# EAGLE board main (EAGLE 8.3.2)
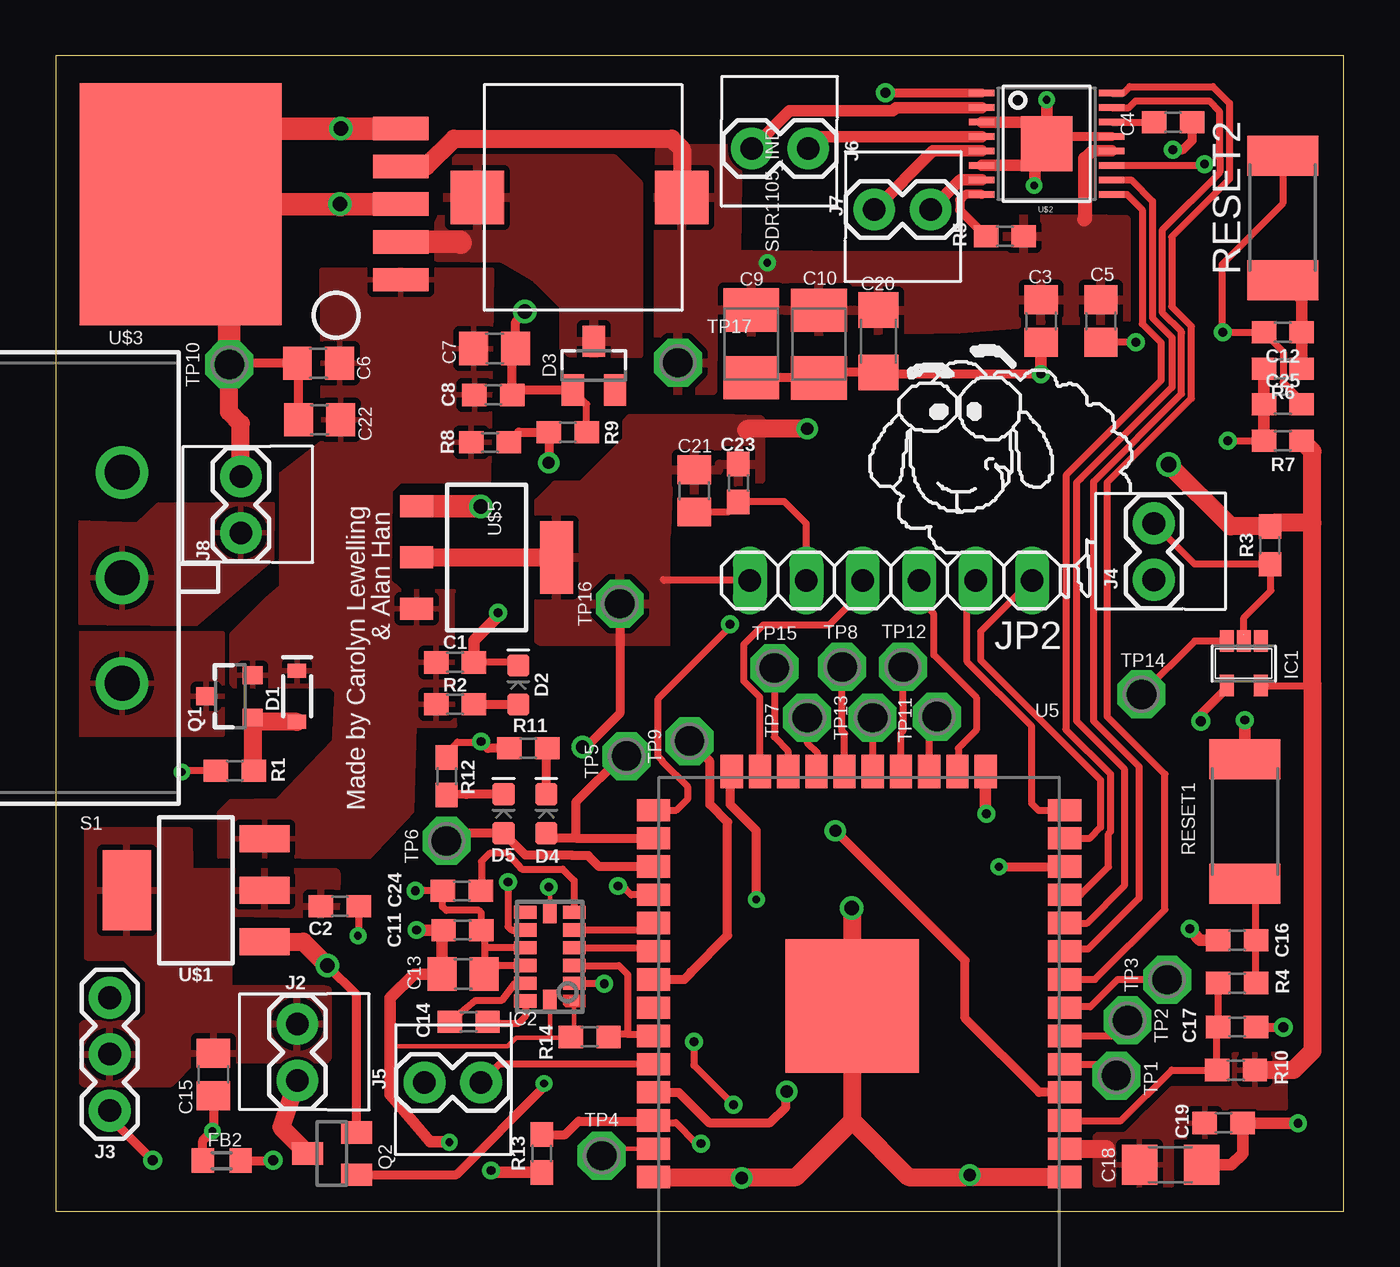
[diagram p0: board, top side]
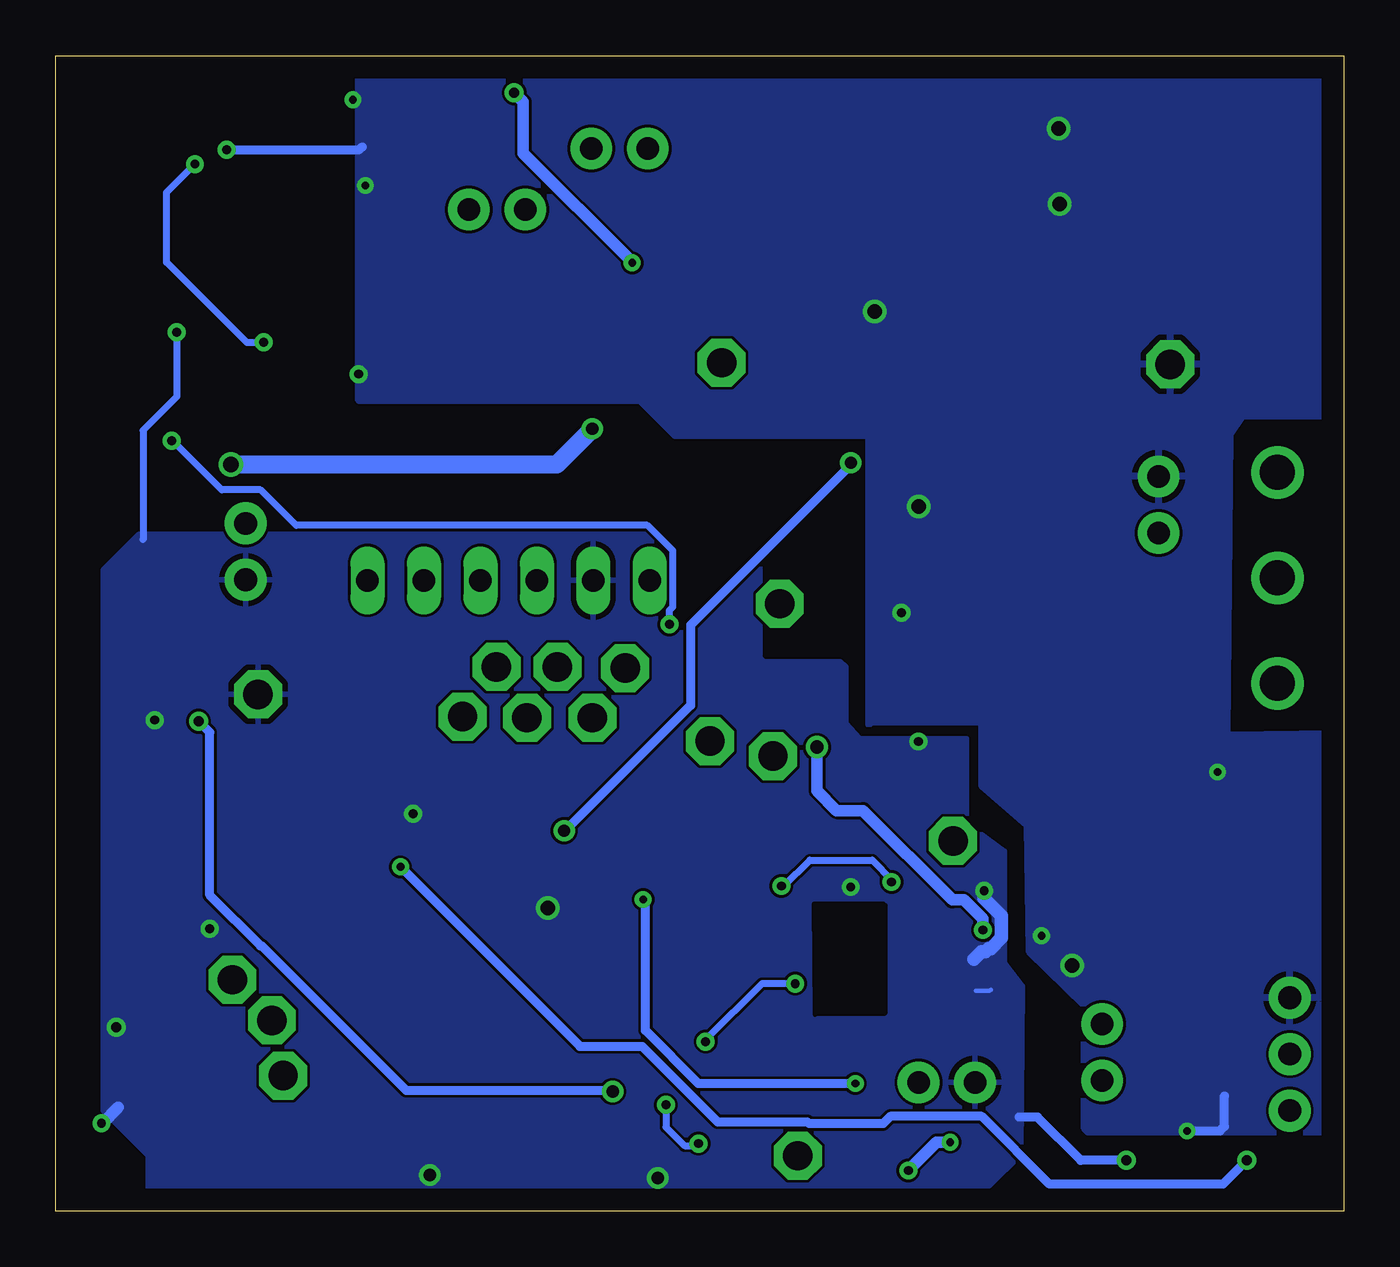
[diagram p1: board, bottom side, seen from below]

Size 58 x 52 mm. Coordinates in mm from the lower left corner, seen from the top.
Outline: 0,0 58,0 58,52 0,52 0,0
Copper layers (1*16): Top 0.035mm / dielectric 1.5mm / Bottom 0.035mm
Design rules "default *": minimum track width 6mil, minimum drill 0.35mm, track to track 5mil, track to pad 5mil, pad to pad 5mil, via to via 5mil, smd to smd 5mil, copper to edge 40mil, drill to drill 6mil, minimum pad ring 10mil, minimum via ring 8mil, stop-mask expansion 4mil, vias tented up to drill 0mil, thermal gap 10mil
bRestrict: area 20.7,8.8 to 23.9,13.8

## Footprints (pad centres in the part's own frame; a part is rotated, then mirrored left to right if it is on the bottom)
0603 = smd 1.1 x 1: 1 -0.85,0; 2 0.85,0
C0805 = smd 1.3 x 1.5: 1 -0.95,0; 2 0.95,0
C0603 = smd 1.1 x 1: 1 -0.85,0; 2 0.85,0
B/3528-21R = smd 1.95 x 2.5: + 1.525,0; - -1.525,0
C1206 = smd 1.6 x 1.8: 1 -1.4,0; 2 1.4,0
SOD-323 = smd 0.63 x 0.83: A 1.15,0; C -1.15,0
LED-0603 = smd 1 x 1: A -0.877,0; C 0.877,0
SOT23 = smd 1 x 1.4: 1 -0.95,-1.1; 2 0.95,-1.1; 3 0,1.1
R0603 = smd 1 x 1.1: 1 -0.85,0; 2 0.85,0
SOT23-5 = smd 0.635 x 0.965: 1 -0.762,-1.016; 2 0,-1.016; 3 0.762,-1.016; 4 0.762,0.991; 5 -0.762,0.991
LGA-14 = smd 0.4 x 0.4: 1 -2,-1.1 | smd 0.6 x 1: 2 -1.2,-1.1; 3 -0.4,-1.1; 4 0.4,-1.1; 5 1.2,-1.1; 6 2,-1.1; 8 2,1.1; 9 1.2,1.1; 10 0.4,1.1; 11 -0.4,1.1; 12 -1.2,1.1; 13 -2,1.1 | smd 1 x 0.6: 7 2,0; 14 -2,0
1X02 = drill 1.016 pad 1.88: 1 0,0; 2 2.54,0
1X03 = drill 1.016 pad 1.88: 1 0,0; 2 2.54,0; 3 5.08,0
1X06 = drill 1.016 long: 1 -6.35,0; 2 -3.81,0; 3 -1.27,0; 4 1.27,0; 5 3.81,0; 6 6.35,0
SOT23-3 = smd 0.8 x 0.9: 1 -0.95,-1; 2 0.95,-1; 3 0,1.1
SW_2512 = smd 1.8 x 3.2: 1 -2.8,0; 2 2.8,0
L102021ML04Q = drill 1.575: P$1 0,-4.75; P$2 0,0; P$3 0,4.75
P1-13 = drill 1.321 pad 2.159 octagon: TP 0,0
ESP-WROOM-32 = smd 1.5 x 1: 1 -9.25,7; 2 -9.25,5.73; 3 -9.25,4.46; 4 -9.25,3.19; 5 -9.25,1.92; 6 -9.25,0.65; 7 -9.25,-0.62; 8 -9.25,-1.89; 9 -9.25,-3.16; 10 -9.25,-4.43; 11 -9.25,-5.7; 12 -9.25,-6.97; 13 -9.25,-8.24; 14 -9.25,-9.51; 25 9.25,-9.51; 26 9.25,-8.24; 27 9.25,-6.97; 28 9.25,-5.7; 29 9.25,-4.43; 30 9.25,-3.16; 31 9.25,-1.89; 32 9.25,-0.62; 33 9.25,0.65; 34 9.25,1.92; 35 9.25,3.19; 36 9.25,4.46; 37 9.25,5.73; 38 9.25,7 | smd 1 x 1.5: 15 -5.7,-11.25; 16 -4.43,-11.25; 17 -3.16,-11.25; 18 -1.89,-11.25; 19 -0.62,-11.25; 20 0.65,-11.25; 21 1.92,-11.25; 22 3.19,-11.25; 23 4.46,-11.25; 24 5.73,-11.25 | smd 6 x 6: GND 0.3,-0.7
SOT223 = smd 1.219 x 2.235: 1 -2.311,-3.099; 2 0,-3.099; 3 2.311,-3.099 | smd 3.6 x 2.2: 4 0,3.099
HTSSOP-16 = smd 0.29 x 1.15: 1 -2.275,-2.925; 2 -1.625,-2.925; 3 -0.975,-2.925; 4 -0.325,-2.925; 5 0.325,-2.925; 6 0.975,-2.925; 7 1.625,-2.925; 8 2.275,-2.925; 9 2.275,2.925; 10 1.625,2.925; 11 0.975,2.925; 12 0.325,2.925; 13 -0.325,2.925; 14 -0.975,2.925; 15 -1.625,2.925; 16 -2.275,2.925 | smd 2.46 x 2.31: 17 0,0
TO263-5 = smd 1.05 x 2.5: 1 -3.4,-9.9; 2 -1.7,-9.9; 3 0,-9.9; 4 1.7,-9.9; 5 3.4,-9.9 | smd 10.9 x 9.1: 6 0,0
SDR1105 = smd 2.4 x 2.4: P$1 0,9.2; P$2 0,0
SOT-223 = smd 0.991 x 1.499: 1 -2.299,-3.15; 2 0,-3.15; 3 2.299,-3.15 | smd 3.277 x 1.499: TAB 0,3.15

## Placement (x,y rotation side)
C1  0.1uF  [0603]  17.98,24.69 0 top
C2  0.1uF  [0603]  12.8,13.72 0 top
C3  10uF  [C0805]  44.36,40.06 270 top
C4  2.2uF  [C0603]  50.3,49 0 top
C5  10uF  [C0805]  47.05,40.06 270 top
C6  22uF  [C0805]  11.84,38.15 180 top
C7  10uF  [C0805]  19.76,38.81 0 top
C8  0.1uF  [0603]  19.71,36.73 0 top
C9  220uF  [B/3528-21R]  31.32,39.03 90 top
C10  220uF  [B/3528-21R]  34.37,39.01 90 top
C11  0.1uF  [0603]  18.32,12.64 0 top
C12  1nF  [0603]  55.24,39.55 180 top
C13  10uF  [C0805]  18.34,10.67 0 top
C14  0.22uF  [0603]  18.6,8.52 0 top
C15  10uF  [C0805]  7.11,6.15 90 top
C16  1nF  [0603]  53.19,12.19 180 top
C17  1nF  [0603]  53.19,8.28 0 top
C18  100uF  [C1206]  50.19,2.08 0 top
C19  1uF  [0603]  52.58,3.96 0 top
C20  100uF  [C1206]  37.05,39.14 270 top
C21  10uF  [C0805]  28.75,32.41 270 top
C22  10uF  [C0805]  11.89,35.61 180 top
C23  0.1uF  [0603]  30.73,32.77 270 top
C24  4.7uF  [0603]  18.29,14.41 180 top
C25  1nF  [0603]  55.24,36.31 0 top
D1  250mA/100V  [SOD-323]  10.87,23.16 270 top
D2  [LED-0603]  20.83,23.67 90 top
D3  BAT54  [SOT23]  24.23,38.05 0 top
D4  red  [LED-0603]  22.1,17.88 90 top
D5  green  [LED-0603]  20.17,17.88 90 top
FB2  [R0603]  7.48,2.27 0 top
FRAME1  FRAME-LETTERNO_PACKAGE  [DUMMY]  -36.83,53.34 0 top  (outside the outline)
FRAME2  FRAME-LETTERNO_PACKAGE  [DUMMY]  46.79,-0.81 270 top
IC1  NC7SZ14M5X  [SOT23-5]  53.49,24.64 180 top
IC2  LSM303DLHC  [LGA-14]  22.25,11.45 90 top
J2  [1X02]  10.88,5.88 90 top
J3  455-1750-1-ND  [1X03]  2.44,4.52 90 top
J4  [1X02]  49.44,28.41 90 top
J5  [1X02]  16.61,5.79 0 top
J6  M1 connector  [1X02]  33.88,47.82 180 top
J7  M2 connector  [1X02]  36.86,45.07 0 top
J8  [1X02]  8.34,30.52 90 top
JP2  [1X06]  37.6,28.38 180 top
Q1  2.5A/30V/105mΩ  [SOT23-3]  7.87,23.16 90 top
Q2  [SOT23]  12.45,2.59 90 top
R1  100k  [0603]  8.08,19.81 0 top
R2  330  [0603]  17.98,22.81 180 top
R3  8.2k  [0603]  54.67,29.96 90 top
R4  470  [0603]  53.19,10.26 180 top
R5  10k  [0603]  42.74,43.87 0 top
R6  470  [0603]  55.24,37.91 180 top
R7  470  [0603]  55.24,34.67 180 top
R8  2k  [0603]  19.56,34.59 180 top
R9  1k  [0603]  23.06,35.05 180 top
R10  470  [0603]  53.14,6.35 180 top
R11  330  [0603]  21.29,20.83 0 top
R12  330  [0603]  17.61,19.57 270 top
R13  10k  [0603]  21.89,2.59 90 top
R14  10k  [0603]  24.04,7.83 0 top
RESET1  S2  [SW_2512]  53.54,17.53 90 top
RESET2  S2  [SW_2512]  55.24,44.69 90 top
S1  [L102021ML04Q]  3,28.5 180 top
TP1  TPPAD1-13  [P1-13]  47.75,6.1 90 top
TP2  TPPAD1-13  [P1-13]  48.26,8.59 90 top
TP3  TPPAD1-13  [P1-13]  50.04,10.41 90 top
TP4  TPPAD1-13  [P1-13]  24.59,2.49 90 top
TP5  TPPAD1-13  [P1-13]  25.7,20.47 90 top
TP6  TPPAD1-13  [P1-13]  17.6,16.66 90 top
TP7  TPPAD1-13  [P1-13]  33.83,22.2 90 top
TP8  TPPAD1-13  [P1-13]  35.41,24.49 90 top
TP9  TPPAD1-13  [P1-13]  28.54,21.15 90 top
TP10  TPPAD1-13  [P1-13]  7.82,38.1 90 top
TP11  TPPAD1-13  [P1-13]  39.67,22.25 270 top
TP12  TPPAD1-13  [P1-13]  38.15,24.49 270 top
TP13  TPPAD1-13  [P1-13]  36.78,22.2 270 top
TP14  TPPAD1-13  [P1-13]  48.88,23.25 90 top
TP15  TPPAD1-13  [P1-13]  32.36,24.43 0 top
TP16  TPPAD1-13  [P1-13]  25.4,27.33 90 top
TP17  TPPAD1-13  [P1-13]  28.02,38.18 90 top
U5  ESP-WROOM-32  [ESP-WROOM-32]  36.17,8.53 180 top
U$1  AZ1117E  [SOT223]  6.31,14.44 90 top
U$2  DRV8833C  [HTSSOP-16]  44.62,48.03 270 top
U$3  AP1506  [TO263-5]  5.64,45.31 90 top
U$4  SDR1105_IND  [SDR1105]  28.19,45.62 90 top
U$5  SC1202-3.3V  [SOT-223]  19.41,29.41 270 top

## Library data of the parts
C1 C2 C8 C11 C12 C14 C16 C17 C19 C23-C25 = electricSheepParty; PROD_ID: CAP-00810
C3-C7 C9 C10 C13 C15 C21 C22 FB2 = rcl
C18 C20 = eagle-ltspice; SPICEMODEL: NONE; SPICEPREFIX: C
D1 = electricSheepParty; PROD_ID: DIO-09646
D2 D4 D5 = electricSheepParty; COMMENT: Power LED
D3 = diode
FRAME1 FRAME2 = SparkFun-Aesthetics; DESIGNER: Nobody; VERSION: v01
IC1 R1-R14 U5 = electricSheepParty
IC2 = st-microelectronics
J2 = electricSheepParty; COMM: Laser Connector
J3 = electricSheepParty; COMM: Servo Connector; PROD_ID: XXX-00000
J4 = electricSheepParty; COMM: Photo Receptor
J5 = electricSheepParty; COMM: LED Connector
J6-J8 = electricSheepParty; COMM: Battery Connector
JP2 = pinhead
Q1 = electricSheepParty; PROD_ID: TRANS-11308
Q2 = adafruit
RESET1 RESET2 = DiscreteComponents
S1 = electricSheepParty; COMM: ON/OFF Switch
TP1-TP17 = testpad
U$1 = electricSheepParty; COMM: 5-6V Lin Reg
U$2 = electricSheepParty; COMM: H-Bridge
U$3 = electricSheepParty; COMM: Buck Regulator
U$4 = sheep
U$5 = carolyn

## Nets
1/3_BAT: R8.1 R9.2 U5.4
3V3: C11.1 C13.1 C18.1 C19.1 C21.1 C23.1 IC1.5 IC2.1 IC2.14 JP2.6 R3.2 R7.1 R10.1 R13.1 R14.1 TP16.TP U5.2 U$5.2 U$5.TAB
3V3M: C3.1 C5.1 C9.+ C10.+ C20.1 R5.2 TP17.TP U$2.1 U$2.12 U$3.4 U$4.P$2
5V: C2.1 C15.2 J2.2 J3.2 U$1.2 U$1.4
6V: C1.1 C6.1 C7.1 C8.1 C22.1 D1.C Q1.2 R2.2 R8.2 U$1.3 U$3.1 U$5.3
6V_RAW: J8.1 S1.P$2
ADC_PHOTO: IC1.2 J4.2 R3.1
AGND: C1.2 C2.2 C3.2 C4.2 C6.2 C7.2 C8.2 C9.- C10.- C15.1 C20.2 C22.2 D2.C D3.1 FB2.1 J3.3 J8.2 Q2.2 R1.1 R9.1 TP10.TP U$1.1 U$2.3 U$2.6 U$2.13 U$2.17 U$3.3 U$3.5 U$3.6 U$5.1
DAT_RDY: IC2.9 U5.28
EN: C17.1 R4.2 R10.2 U5.3
GND: C11.2 C12.2 C13.2 C16.2 C17.2 C18.2 C19.2 C21.2 C23.2 C24.2 C25.2 FB2.2 IC1.3 IC2.7 IC2.10 IC2.11 J4.1 J5.1 JP2.5 R11.1 R12.1 RESET1.2 RESET2.2 TP14.TP U5.1 U5.15 U5.38 U5.GND
INT1: IC2.5 U5.29
INT2: IC2.4 U5.30
IO0: C25.1 R6.2 R7.2 U5.25
M1+: J6.2 U$2.2
M1-: J6.1 U$2.4
M2+: J7.2 U$2.7
M2-: J7.1 U$2.5
N$1: D1.A Q1.1 R1.2
N$2: D2.A R2.1
N$3: Q1.3 S1.P$3
N$4: TP1.TP U5.5
N$5: TP2.TP U5.6
N$6: C12.1 R6.1 RESET2.1
N$7: D3.3 U$3.2 U$4.P$1
N$8: C4.1 U$2.14
N$9: C5.2 U$2.11
N$10: J2.1 Q2.3
N$11: C16.1 R4.1 RESET1.1
N$13: R5.1 U$2.8
N$14: TP3.TP U5.7
N$15: TP8.TP U5.20
N$16: D4.A TP5.TP U5.26
N$17: TP7.TP U5.21
N$18: TP15.TP U5.22
N$19: D5.A TP6.TP U5.27
N$20: TP11.TP U5.17
N$21: TP12.TP U5.18
N$22: TP13.TP U5.19
N$23: TP9.TP U5.31
N$24: TP4.TP U5.37
N$25: D4.C R11.2
N$26: D5.C R12.2
N$28: C14.2 IC2.13
N$29: C14.1 IC2.12
N$35: C24.1 IC2.6
PHOTO: IC1.4 U5.35
PWM_LASER: Q2.1 U5.24
PWM_LED: J5.2 U5.34
PWM_M1A: U5.8 U$2.16
PWM_M1B: U5.9 U$2.15
PWM_M2A: U5.11 U$2.9
PWM_M2B: U5.10 U$2.10
PWM_SERVO: J3.1 U5.12
SCL: IC2.2 R13.2 U5.36
SDA: IC2.3 R14.2 U5.33
TCK: JP2.3 U5.16
TDI: JP2.2 U5.14
TDO: JP2.4 U5.23
TMS: JP2.1 U5.13

## Tracks (layer width: path | path; a pad name or v marks a point on that pad's centre or on a via)
1/3_BAT  (via drill 0.55)
  Top 0.406: R8.1 20.86,35.05 R9.2 22.21,33.69 v22.2,33.68 | U5.4 44.29,5.34 40.95,8.69 40.95,11.28 v35.1,17.12
  Bottom 0.406: v22.2,33.68 22.2,33.58 29.41,26.36 29.41,22.76 34.95,17.22 35,17.22 v35.1,17.12
3V3  (via drill 0.35, 0.4, 0.55, 0.6, 0.7)
  Top 0.203: IC2.1 23.35,7.99 R14.1 23.17,7.81 22.22,7.81 | 22.22,7.81 20.74,7.81 20.34,7.41 15.11,7.41 15.06,7.36 | 22.22,7.81 22.25,7.84 IC2.14
  Top 0.305: JP2.6 27.39,28.38 27.36,28.42 | IC1.5 56.53,23.65 56.58,23.7
  Top 0.406: TP16.TP 25.4,22.4 23.93,20.93 23.77,20.93 v23.72,20.88
  Top 0.508: v17.73,3.1 17.4,3.12 16.87,3.12 15.06,5.23 15.06,7.36 15.06,9.59 16.13,10.66 C13.1 17.39,12.57 C11.1 v16.26,12.64 v16.25,12.65 | 21.76,1.88 R13.1 19.7,1.74 v19.61,1.83
  Top 0.813: U$5.2 U$5.TAB | v33.83,35.2 31.14,35.2 31.09,35.15 | R10.1 55.73,6.35 56.58,7.2 56.58,23.7 56.58,30.98 | U5.2 47.28,2.8 47.3,2.79 | R7.1 56.58,34.19 56.58,30.98 | 56.58,30.98 54.84,30.98 R3.2 52.9,30.81 v50.1,33.6
  Bottom 0.406: 25.04,26.98 TP16.TP
  Bottom 0.508: v17.73,3.1 18.34,3.1 v19.61,1.83 | v16.25,12.65 16.25,13.15 17.11,14.01 17.63,14.01 21.64,18.03 22.84,18.03 23.72,18.91 v23.72,20.88
  Bottom 0.813: v50.1,33.6 35.43,33.6 v33.83,35.2
  pour Top: 21.74,31.9 21.74,25.7 21.79,25.65 27.38,25.65 27.48,25.55 27.48,30.43 27.53,30.58 27.58,32.46 29.72,32.46 30.07,32.77 31.75,32.92 31.75,35.61 30.48,35.66 25.86,35.66 25.7,35.51 25.7,34.7 23.67,32.66 22.5,32.66
  pour Top: 46.79,3.35 46.79,1.22 46.84,1.17 50.24,1.17 50.24,3.25 50.29,3.3 52.07,3.35 52.07,4.62 55.37,4.62 55.32,7.11 53.04,7.06 53.04,5.54 50.24,5.54 48.16,3.45 46.89,3.45
3V3M  (via drill 0.35, 0.45)
  Top 0.406: U$2.1 37.37,50.31 v37.35,50.33
  Top 0.508: U$2.12 46.68,47.71 46.34,47.37
  Top 0.635: 46.34,47.37 46.34,44.68 46.29,44.63
  Top 0.813: U$3.4 16.69,47.01 17.93,48.26 27.74,48.26 28.19,47.8 U$4.P$2
  Bottom 0.508: v37.35,50.33 36.94,49.92 36.94,47.61 32.04,42.71 v32.04,42.67
  pour Top: 27.13,46.89 27.13,37.39 27.58,36.93 29.59,36.93 29.63,39.57 33.5,39.56 40.7,39.71 43.29,39.9 43.29,39.95 43.4,40.06 48.2,40.09 48.2,44.62 47.35,44.63 42.84,44.63 42.84,43.1 42.74,43 35.78,43 30.68,43.07 30.71,44.91 30.73,47.83 27.18,47.8
5V
  pour Top: 12.65,15.27 6.07,15.3 6.05,17.11 1.42,17.11 1.42,11.43 3.1,11.43 4.17,10.36 4.17,8.84 3.76,8.43 1.27,8.43 0.97,8.13 0.97,6.05 1.27,5.74 5.18,5.74 6.25,6.81 12.19,6.81 12.29,6.91 12.29,9.96 12.09,10.01 7.82,10.01 7.82,12.24 7.81,13.4 12.34,13.32 12.66,13.31 12.7,15.11
6V
  pour Top: 7.92,25.96 7.92,23.72 8.03,23.62 12.4,23.62 12.65,23.37 12.55,21.13 10.01,18.49 7.87,18.44 7.37,17.93 7.37,15.95 8.04,15.96 14.11,15.91 16.05,17.98 16.15,21.89 16.26,21.84 17.98,21.84 17.88,23.01 17.88,27.84 17.93,27.89 15.54,27.89 15.29,28.14 15.24,28.14 15.04,28.35 15.09,32.41 15.49,32.82 19.51,32.87 19.66,42.37 11.99,42.37 12.04,34.65 10.16,33.17 10.16,28.09 9.5,27.53
6V_RAW
  pour Top: 0.36,30.48 0.36,26.52 0.3,26.47 6.3,26.42 9.74,29.36 9.78,31.83 4.62,31.79 3.71,30.91 0.86,30.99
ADC_PHOTO
  Top 0.305: J4.2 51.28,29.11 R3.1 54.71,29.07 54.71,27.93 53.49,26.71 IC1.2
AGND  (via drill 0.35, 0.4, 0.65)
  Top 0.305: C2.2 13.65,12.61 13.66,12.6 13.66,12.45 v13.61,12.39 | R1.1 5.69,19.81 v5.69,19.76 | C1.2 20.69,24.69 D2.C | R9.1 23.91,36.32 D3.1
  Top 0.406: C15.1 7.11,3.66 v7.06,3.61 6.63,3.18 FB2.1 | D3.1 20.78,36.95 C8.2 20.56,38.66 | C7.2 20.71,40.02 20.98,40.28 20.98,40.34 v21.13,40.49 | C22.2 10.94,38.1 C6.2 7.87,38.15 TP10.TP | U$2.13 45.28,48.36 | v50.3,47.76 50.75,47.76 51.17,48.18 51.17,48.98 C4.2 | Q2.2 13.55,9.73 v12.23,11.05 | v44.36,37.67 37.12,37.67 C20.2 34.59,37.74 34.35,37.5 | 34.35,37.5 C9.- | 34.35,37.5 C10.-
  Top 0.508: U$2.3 43.64,49.01 U$2.17 | 45.28,48.36 44.94,48.36 U$2.17 | U$2.6 44.1,47.06 | 44.1,47.06 44.16,47.12 44.16,47.57 U$2.17 | 44.1,47.06 44.1,46.37 44.11,46.35 44.11,46.2 v44.06,46.15 | U$2.17 v44.62,50.01 | C3.2 v44.36,37.67 | C1.2 18.83,25.69 19.91,26.77 v19.91,26.92
  Top 0.813: J8.2 8.34,35.43 7.81,35.97 7.81,38.09 TP10.TP | U$1.1 11.15,12.13 v12.23,11.05
  Top 1.016: U$5.1 19.04,31.71 19.05,31.7 v19.15,31.7 | C7.2 20.56,38.66 | U$3.3 12.85,45.31 12.8,45.26 | 12.8,45.26 v12.8,45.31 | U$3.6 12.75,45.31 12.8,45.26 | U$3.5 12.96,48.71 12.95,48.72 v12.85,48.72 9.55,48.72 9.5,48.67 | TP10.TP 7.82,40.69 8.08,40.95
  Bottom 0.406: v7.06,3.61 5.59,3.61 5.38,3.81 5.38,5.18 | 44.2,47.89 44.32,47.76 v50.3,47.76
  pour Bottom: 0.36,3.56 11.53,3.56 11.68,3.71 11.68,9.25 14.16,11.65 14.24,17.36 16.31,19.15 16.31,21.89 16.41,22 21.29,22 21.39,21.89 21.39,34.8 21.29,34.9 30.12,34.9 31.7,36.47 44.35,36.47 44.35,51.51 44.4,51.56 0.86,51.56 0.71,51.41 0.69,35.74 4.57,35.78 5.14,34.94 5.28,21.44 1.97,21.48 0.7,21.5 0.66,4.78 0.36,4.47
DAT_RDY  (via drill 0.4)
  Top 0.305: U5.28 25.91,14.23 25.52,14.63 v25.33,14.63 | v20.37,14.81 20.37,12.81 20.53,12.64 IC2.9
  Bottom 0.305: v25.33,14.63 25.2,14.63 24.04,15.79 21.23,15.79 20.34,14.89 20.34,14.84 v20.37,14.81
EN
  Top 0.305: U5.3 47.97,4.07 50.24,6.35 R10.2 52.29,8.23 C17.1 R4.2
GND  (via drill 0.4, 0.45, 0.55, 0.65)
  Top 0.203: IC2.7 22.25,14.46 22.24,14.46 22.24,14.55 v22.2,14.59
  Top 0.305: R12.1 17.61,20.62 18.09,21.11 19.12,21.11 v19.15,21.13 | IC2.11 19.67,11.05 C13.2 19.32,10.7 19.32,11.84 19.33,11.85 | IC2.10 19.33,11.85 | 19.33,11.85 19.33,12.48 C11.2 19.17,13.41 19.05,13.53 17.58,13.53 17.42,13.69 17.42,14.4 C24.2 v16.21,14.41 v16.2,14.43 | JP2.5 33.8,30.94 32.8,31.93 30.75,31.93 C23.2 30.28,31.46 C21.2 | C25.2 56.09,36.46 55.27,37.29 55.27,38.68 C12.2 52.69,39.55 | 52.69,39.55 v52.54,39.55 | RESET2.2 55.24,45.34 52.5,42.6 52.5,39.74 52.69,39.55 | IC1.3 51.28,25.65 TP14.TP
  Top 0.406: C17.2 v55.27,8.28 | R11.1 19.46,20.83 v19.15,21.13 | FB2.2 9.78,2.27 v9.79,2.29
  Top 0.508: U5.15 41.87,17.99 41.86,17.98 41.86,17.93 v41.91,17.88 | RESET1.2 v53.54,22.1 | C16.2 51.51,12.19 51.36,12.34 51.36,12.39 v51.05,12.7 | v55.93,3.96 C19.2 53.43,3.92 53.44,3.91 53.44,2.59 52.93,2.08 C18.2
  Top 0.813: 35.87,4.06 33.34,1.53 30.8,1.53 | 35.87,4.06 U5.GND | 35.87,4.06 38.39,1.53 40.95,1.53 41,1.57 41.1,1.57 | 30.8,1.53 30.79,1.52 30.86,1.52 v30.89,1.49 | U5.38 30.8,1.53 | 41.1,1.57 v41.15,1.63 | U5.1 41.14,1.53 41.1,1.57 | U5.GND 35.87,13.6 v35.84,13.63
  Bottom 0.203: 16.56,9.91 15.95,9.91 15.9,9.96
  Bottom 0.305: v52.54,39.55 52.54,36.65 54.06,35.13 54.06,30.21
  Bottom 0.406: v9.79,2.29 11.85,2.29 13.79,4.23 14.63,4.23
  Bottom 0.508: v55.93,3.96 55.88,3.96 55.17,4.67
  Bottom 0.61: v16.2,14.43 16.2,14.07 15.41,13.28 15.41,12.3 15.9,11.81 16.01,11.81 16.15,11.67 16.33,11.67 16.66,11.34
  pour Bottom (rank 2): 24.49,0.86 53.8,0.86 53.85,0.91 53.85,2.49 55.88,4.52 55.88,28.85 54.25,30.48 37.03,30.48 35.51,32 26.42,32 26.26,31.85 26.26,24.89 26.11,24.74 22.66,24.74 22.4,24.49 22.4,21.95 21.79,21.29 16.97,21.29 16.97,17.48 15.25,16.22 15.25,11.2 14.45,10.13 14.53,2.54 15.95,1.12 24.23,1.12
INT1
  Top 0.203: 26.59,12.63 26.64,12.68 U5.29
  Top 0.305: IC2.5 26.61,12.65 26.64,12.68
INT2
  Top 0.203: U5.30 26.78,11.83
  Top 0.305: IC2.4 26.76,11.85 U5.30
IO0  (via drill 0.4)
  Top 0.305: U5.25 27.95,18.04 28.46,18.55 28.46,19.09 27.32,20.23 27.32,20.27 27.13,20.46 27.13,23.05 30.25,26.18 30.25,26.29 v30.37,26.4 | v52.77,34.67 R7.2
  Top 0.406: 27.11,18.24 U5.25
  Top 0.508: R7.2 C25.1 R6.2
  Bottom 0.305: v30.37,26.4 30.37,27.04 30.21,27.19 30.21,29.72 31.36,30.86 47.17,30.86 48.77,32.46 50.52,32.46 52.58,34.52 52.62,34.52 v52.77,34.67
M1+
  Top 0.508: U$2.2 37.82,49.66 37.69,49.52 33.05,49.52 J6.2
M1-
  Top 0.508: U$2.4 34.42,48.36 J6.1
M2+
  Top 0.508: U$2.7 40.73,46.41 J7.2
M2-
  Top 0.508: U$2.5 39.49,47.71 J7.1
N$1
  Top 0.813: R1.2 8.87,19.86 Q1.1 9.07,22.02 D1.A
N$2
  Top 0.406: D2.A 18.85,22.8 R2.1
N$3
  pour Top: 1.02,26.01 1.02,21.49 1.07,21.44 7.52,21.44 7.52,26.01
N$4
  Top 0.305: U5.5 47.23,6.61 TP1.TP
N$5
  Top 0.305: U5.6 47.56,7.88 TP2.TP
N$6
  Top 0.508: R6.1 C12.1 56.09,41.04 RESET2.1
N$7
  Top 1.016: U$3.2 18.21,43.61 18.24,43.59
  pour Top: 17.17,42.93 20.12,42.88 21.69,41.96 21.69,41.91 22.86,40.74 22.86,38.91 23.16,38.61 26.21,38.61 26.26,38.56 26.26,46.23 25.15,47.35 17.78,47.35 17.63,47.19 17.63,45.31 17.22,44.4 17.17,44.3
N$8
  Top 0.305: U$2.14 C4.1
N$9  (via drill 0.4)
  Top 0.305: C5.2 47.07,39.09 v48.63,39.09 | U$2.11 51.66,47.06 v51.72,47.12
  Bottom 0.305: v51.72,47.12 51.83,47.02 53,45.85 53,42.7 49.39,39.09 v48.63,39.09
N$10
  Top 0.813: J2.1 10.16,3.78 Q2.3
N$11
  Top 0.305: R4.1 C16.1 54.04,14.23 RESET1.1
N$13
  Top 0.406: U$2.8 40.97,45.76 40.7,45.49 40.7,45.05 R5.1
N$14
  Top 0.305: TP3.TP 47.8,10.41 46.58,9.2 45.46,9.2 U5.7
N$15
  Top 0.305: U5.20 35.52,21.5 35.4,21.63 35.4,22.77 35.41,22.79 TP8.TP
N$16
  Top 0.406: 23.47,16.77 U5.26 | 23.47,16.77 22.33,16.77 D4.A | TP5.TP 25.5,20.47 23.42,18.39 23.42,16.82 23.47,16.77
N$17
  Top 0.305: TP7.TP 33.83,21.08 34.29,20.62 34.29,19.82 U5.21
N$18
  Top 0.305: TP15.TP 32.36,21.34 32.97,20.73 32.97,19.8 U5.22
N$19
  Top 0.406: TP6.TP 18.32,17 D5.A 21.15,16.02 23.23,16.02 23.26,16 23.98,16 24.48,15.5 U5.27
N$20
  Top 0.305: U5.17 39.33,21.91 TP11.TP
N$21
  Top 0.305: U5.18 38.06,21.52 38.16,21.63 38.16,22.77 38.15,22.79 TP12.TP
N$22
  Top 0.305: TP13.TP | U5.19 TP13.TP
N$23
  Top 0.406: U5.31 28.31,10.42 28.6,10.72 28.6,10.75 30.26,12.4 30.26,17.51 29.45,18.31 29.45,20.24 TP9.TP
N$24
  Top 0.203: U5.37 25.31,2.8 TP4.TP
N$25
  Top 0.406: D4.C 22.1,20.79 R11.2
N$26
  Top 0.406: D5.C 18.49,18.76 R12.2
N$28
  Top 0.305: IC2.13 21.15,8.78 20.81,8.44 19.53,8.44 C14.2
N$29
  Top 0.305: C14.1 18.89,9.48 20.07,9.48 20.67,10.25 IC2.12
N$35
  Top 0.305: IC2.6 23.35,14.87 22.83,15.39 20.99,15.39 20.34,16.09 19.54,16.09 19.18,15.73 19.18,14.46 C24.1 | IC2.6
PHOTO  (via drill 0.45, 0.55)
  Top 0.406: v51.56,22.05 51.56,22.36 52.73,23.53 IC1.4 | 26.96,5.38 U5.35 28.05,5.34 29.42,3.98 32.17,3.98 32.87,4.68 32.87,5.34 v32.92,5.38
  Bottom 0.406: v51.56,22.05 51.05,21.54 51.05,14.22 48.77,11.94 48.72,11.94 42.22,5.44 32.97,5.44 v32.92,5.38
PWM_LASER  (via drill 0.35)
  Top 0.406: Q2.1 18.05,1.64 22,5.59 v22,5.74 | v31.55,14.02 31.55,17.12 30.38,18.29 30.38,19.72 U5.24
  Bottom 0.406: v22,5.74 29.06,5.74 31.45,8.13 31.45,13.77 31.55,13.87 v31.55,14.02
PWM_LED
  Top 0.305: U5.34 19.98,6.61 J5.2
PWM_M1A
  Top 0.305: U$2.16 48.06,50.31 48.35,50.6 52.1,50.6 52.84,49.86 52.84,46.44 50.24,43.84 50.24,40.7 51.13,39.81 51.13,36.58 47.35,32.79 47.35,22.25 49.94,19.66 49.94,13.56 46.8,10.42 U5.8
PWM_M1B
  Top 0.305: U$2.15 48.32,49.66 48.63,49.96 51.93,49.96 52.39,49.51 52.39,47.42 52.41,47.4 52.41,46.73 49.81,44.13 49.81,40.45 50.67,39.59 50.67,39.51 50.69,39.5 50.69,36.78 46.74,32.83 46.74,22.05 48.77,20.02 48.77,14.07 46.48,11.79 45.51,11.79 U5.9
PWM_M2A
  Top 0.305: U5.11 46.14,14.23 47.4,15.49 47.4,16.98 47.5,17.08 47.5,19.66 45.47,21.69 45.49,21.72 45.49,33.11 49.76,37.38 49.76,39.09 48.92,39.93 48.92,45.07 48.24,45.76 U$2.9
PWM_M2B
  Top 0.305: U5.10 46.44,12.96 48.11,14.63 48.11,19.91 45.97,22.05 45.97,32.79 46.23,33.05 | U$2.10 48.42,46.41 49.38,45.45 49.38,40.2 50.25,39.32 50.25,37.07 46.23,33.05 | 46.23,33.05 46.1,32.92
PWM_SERVO  (via drill 0.35, 0.45)
  Top 0.406: v42.47,15.49 45.41,15.49 U5.12 | J3.1 2.44,4.22 v4.37,2.29
  Bottom 0.406: 42.32,15.34 v42.47,15.49 34.39,7.42 31.6,7.42 28.19,4.01 24.15,4.01 24.08,3.94 20.75,3.94 20.42,4.27 16.31,4.27 13.26,1.22 5.45,1.22 4.38,2.29 v4.37,2.29
SCL  (via drill 0.4)
  Top 0.305: IC2.2 24.48,10.25 v24.69,10.25 v24.7,10.24 | v28.74,7.62 28.74,6.61 | 28.74,6.61 28.75,6.59 | 28.74,6.61 28.74,6.56 v30.52,4.78 | v29.05,3.04 28.86,3.04 27.92,3.98 27.01,3.98 U5.36
  Top 0.406: R13.2 22.94,3.44 23.55,4.05 26.94,4.05 27.01,3.98
  Bottom 0.305: v24.7,10.24 26.2,10.24 28.75,7.68 28.75,7.64 v28.74,7.62 | v30.52,4.78 30.52,3.77 29.69,2.94 29.15,2.94 v29.05,3.04
SDA
  Top 0.305: IC2.3 25.36,11.05 25.75,10.65 25.75,7.97 25.74,7.96 | 25.74,7.96 26.85,7.96 U5.33 | 25.74,7.96 25.02,7.96 R14.2
TCK
  Top 0.305: 39.53,25.06 39.53,25.03 | 39.53,25.03 41.45,23.11 41.45,21.64 40.64,20.83 40.64,19.82 U5.16 | 39.53,25.03 39.53,26.87 38.94,27.47 38.94,28.32 JP2.3
TDI
  Top 0.305: U5.14 45.41,18.03 44.25,18.03 43.94,18.34 43.94,21.82 41.03,24.73 41.03,28 JP2.2
TDO
  Top 0.305: U5.23 31.71,23.13 30.98,23.86 30.98,25.49 31.85,26.36 34.82,26.36 36.34,27.88 JP2.4
TMS
  Top 0.305: U5.13 46.53,16.76 47.04,17.27 47.04,19.41 41.66,24.79 41.66,26.09 JP2.1

## Text on the board
tNames: & Alan Han | Made by Carolyn Lewelling
200bmp: C:/Users/cdlew/Downloads/sheep.bmp | C:/Users/cdlew/Downloads/sheep.bmp | C:/Users/cdlew/Downloads/sheep.bmp